# Altium PCB MiniCoil - Cap Board.PcbDoc
Units mm, origin at the board's own origin, x right, y up, seen from the top; angles counter-clockwise.
Board outline 233.11 x 109.35 mm, 2 copper layers (Top Layer, Bottom Layer); 30 components, 7 nets, 64 pads, 0 vias.
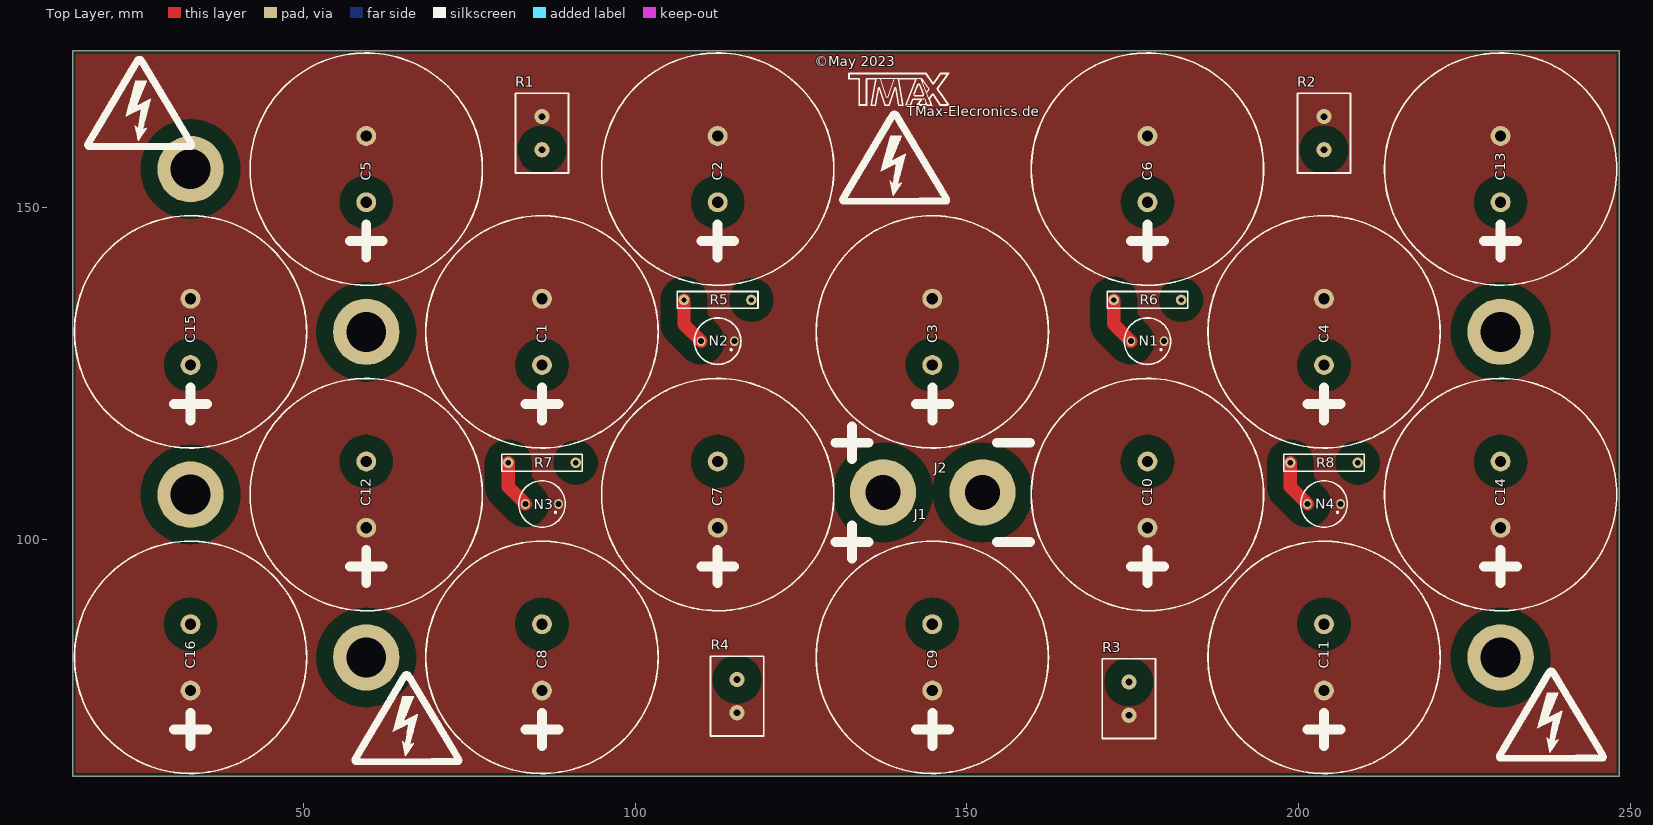
[diagram p0: Top Layer view]
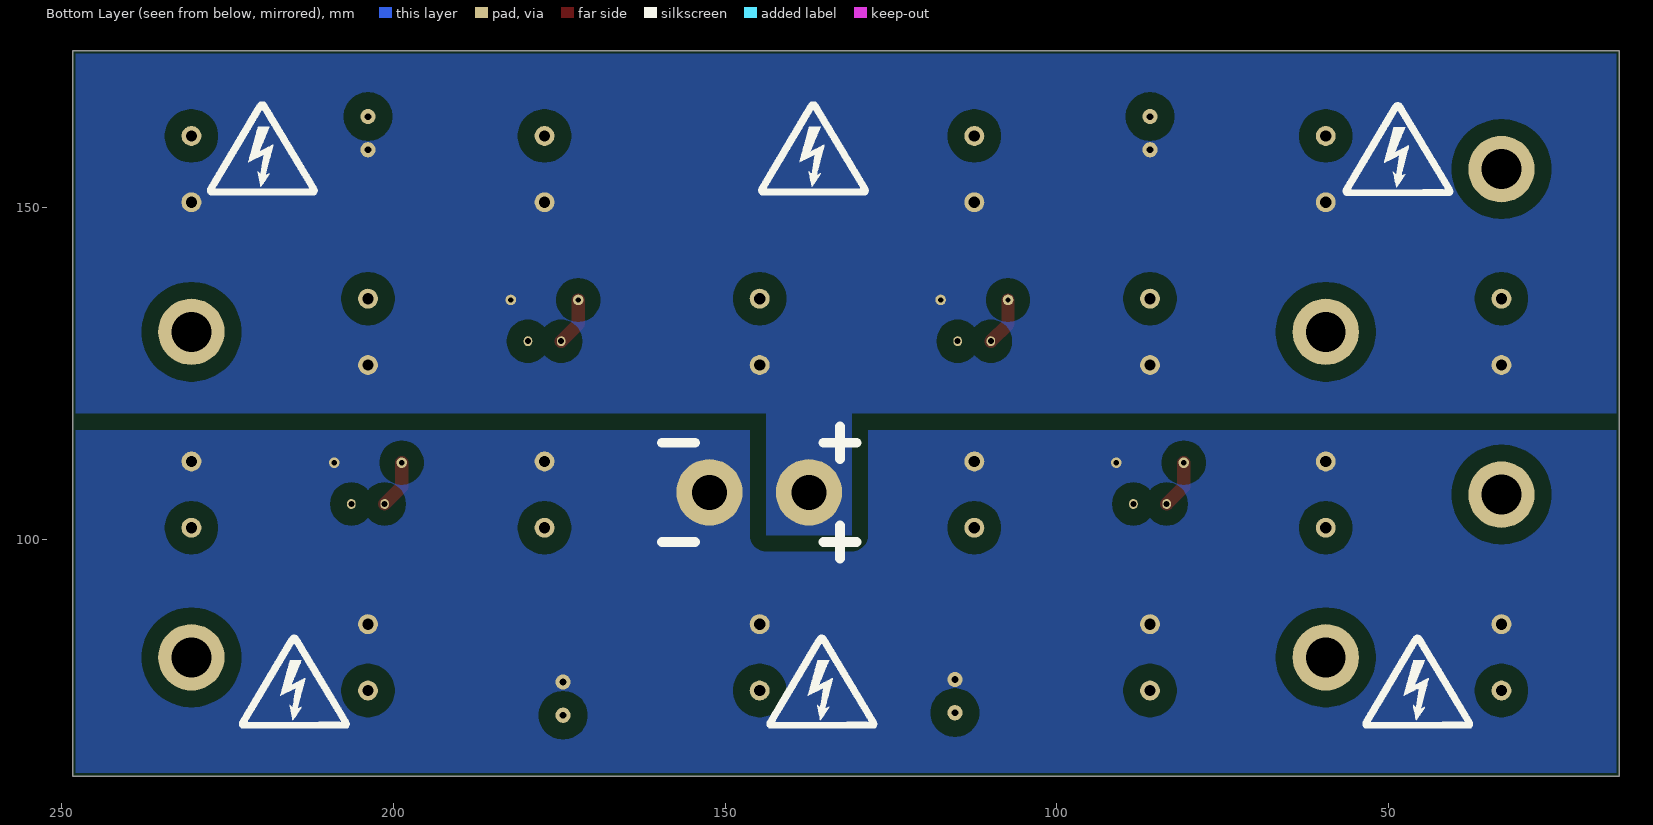
[diagram p1: Bottom Layer view, seen from below]
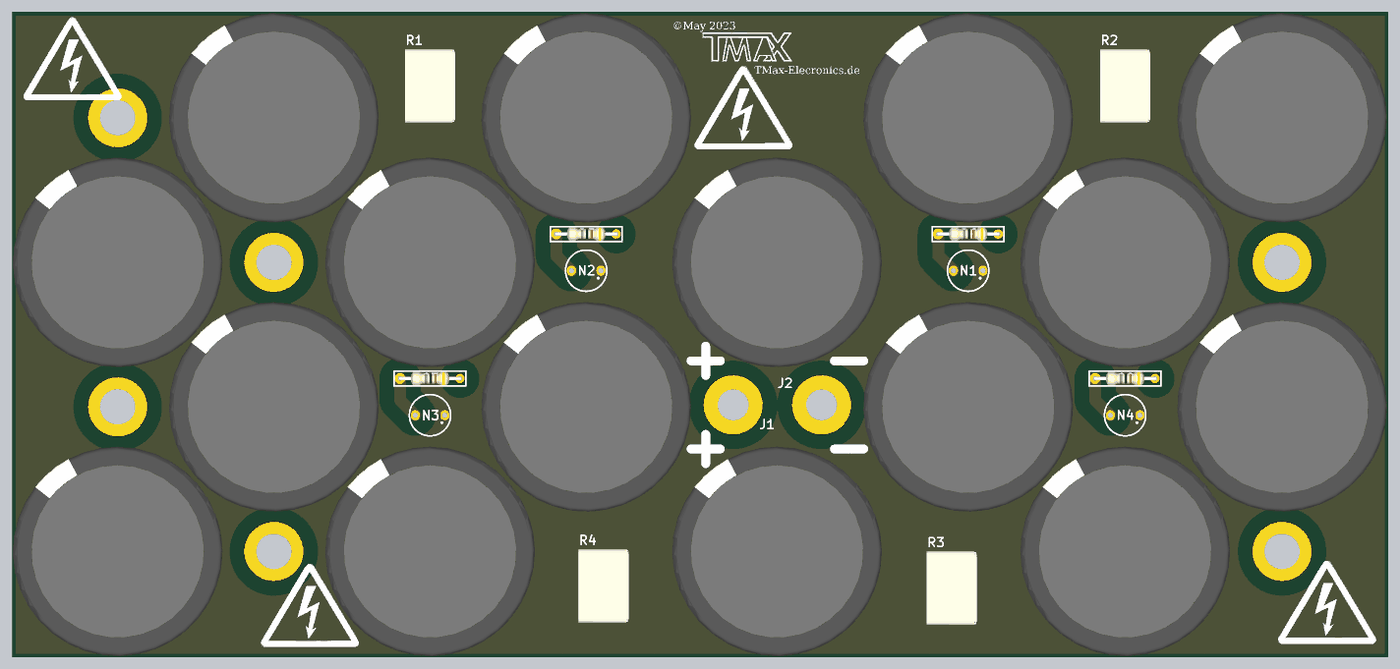
[diagram p2: 3D render of the assembled board from above, using the file's embedded part models]

## Layer stack, top to bottom
Top Solder: solder mask 0.0102, Solder Resist, Dk 3.5
Top Layer: signal copper 0.0356
Dielectric 1: dielectric 0.32, FR-4, Dk 4.8
Bottom Layer: signal copper 0.0356
Bottom Solder: solder mask 0.0102, Solder Resist, Dk 3.5

## Board outline
15.24,64.262 15.24,173.609 248.346,173.609 248.346,64.262

## Design rules (kind name [scope] priority, off if disabled: settings)
BoardOutlineClearance [All] p1: gap=0.5 ignorepadtopadclearanceinfootprint=FALSE except(0: Arc-SplitContinuation Track-SplitContinuation SMDPad-SplitContinuation THPad-SplitContinuation Via-SplitContinuation Fill-SplitContinuation Poly-SplitContinuation Region-SplitContinuation Text-SplitContinuation)
Clearance [All] p1: gap=2.5 ignorepadtopadclearanceinfootprint=FALSE except(0: Arc-Text Arc-Hole Track-Text Track-Hole SMDPad-Text SMDPad-Hole THPad-Text THPad-Hole Via-Text Via-Hole Fill-Text Fill-Hole Poly-Text Poly-Hole Region-Text Region-Hole Text-Text Text-Hole)
Height [All] p1: minheight=0 maxheight=1000 prefheight=0
PolygonConnect [All] p1: connectstyle=Direct reliefconductorwidth=0.254 reliefentries=4 polygonreliefangle="90 Angle" airgapwidth=0.254
RoutingVias [All] p1: holewidth=10 width=0.7 viastyle="Through Hole" minholewidth=0.3 minwidth=0.5 maxholewidth=0.4 maxwidth=10
SolderMaskExpansion [All] p1: expansion=0.102 istentingtop=FALSE
UnRoutedNet [All] p1: checkbadconnections=TRUE
Width [All] p1: maxlimit=10 minlimit=0.152 preferedwidth=0.4 minimp=50.000000 maximp=50.000000 favimp=50.000000
28 further rules are at their usual default settings.

## Components (designator, comment, footprint, x,y, rotation, side; value= is the part's Value field where it differs from the comment)
C1 "1mF 300V" "ELKO 35x50x10" 85.977,131.222 r90 top locked
C2 "1mF 300V" "ELKO 35x50x10" 112.458,155.749 r90 top locked
C3 "1mF 300V" "ELKO 35x50x10" 144.806,131.222 r90 top locked
C4 "1mF 300V" "ELKO 35x50x10" 203.831,131.222 r90 top locked
C5 "1mF 300V" "ELKO 35x50x10" 59.497,155.749 r90 top locked
C6 "1mF 300V" "ELKO 35x50x10" 177.222,155.749 r90 top locked
C7 "1mF 300V" "ELKO 35x50x10" 112.458,106.695 r90 top locked
C8 "1mF 300V" "ELKO 35x50x10" 85.977,82.169 r90 top locked
C9 "1mF 300V" "ELKO 35x50x10" 144.806,82.169 r90 top locked
C10 "1mF 300V" "ELKO 35x50x10" 177.222,106.695 r90 top locked
C11 "1mF 300V" "ELKO 35x50x10" 203.831,82.169 r90 top locked
C12 "1mF 300V" "ELKO 35x50x10" 59.497,106.695 r90 top locked
C13 "1mF 300V" "ELKO 35x50x10" 230.439,155.749 r90 top locked
C14 "1mF 300V" "ELKO 35x50x10" 230.439,106.695 r90 top locked
C15 "1mF 300V" "ELKO 35x50x10" 33.018,131.222 r90 top locked
C16 "1mF 300V" "ELKO 35x50x10" 33.018,82.169 r90 top locked
J1 "+" "575-8 Banana Jack" 137.373,107.032 r0 top
J2 "-" "575-8 Banana Jack" 152.373,107.032 r0 top
N1 "Nixie Dot" INS-1 177.221,129.81 r0 top
N2 "Nixie Dot" INS-1 112.457,129.81 r0 top
N3 "Nixie Dot" INS-1 85.977,105.283 r0 top
N4 "Nixie Dot" INS-1 203.83,105.283 r0 top
R1 "470k" "SQM-03 3W" 85.977,161.163 r90 top
R2 "470k" "SQM-03 3W" 203.828,161.163 r90 top
R3 "470k" "SQM-03 3W" 174.432,75.946 r90 top
R4 "470k" "SQM-03 3W" 115.377,76.327 r90 top
R5 "470k" "0207 THT" 112.457,136.033 r90 top
R6 "470k" "0207 THT" 177.221,136.033 r90 top
R7 "470k" "0207 THT" 85.977,111.506 r90 top
R8 "470k" "0207 THT" 203.83,111.506 r90 top

## Footprints (in the part's own frame and the unit in brackets; to place one, negate y for a bottom-side part, rotate by r counter-clockwise, add the part's x,y. Pads: shape width x height; smd on the part's side, far side on the other; paste and mask are expansions set on the pad)
"0207 THT" [mm]
  round 1.6 hole 0.8: 1(0,5.08) 2(0,-5.08)
  silkscreen extent -1.27,-6.08 1.27,6.08, body extent -1.15,-5.38 1.15,5.38, height 3.15
"575-8 Banana Jack" [mm] "Shitstone electronics 575-8 Banana Jack"
  round 10 hole 5.25: 1(0,0)
"ELKO 35x50x10" [mm]
  round 3 hole 1.7: 1(-5,0) 2(5,0)
  silkscreen extent -17.5,-17.5 17.5,17.5, body extent -17.78,-17.77 17.78,17.78, height 50.8
INS-1 [mm] "Neon dot"
  oval 1.3x1.5 hole 0.9: A(-2.5,0) K(2.5,0)
  silkscreen extent -3.5,-3.5 3.5,3.5, body extent -3.5,-3.5 3.5,3.5, height 28
"SQM-03 3W" [mm] "SQM-03 3W"
  round 2.3 hole 1: 1(2.5,0) 2(-2.5,0)
  silkscreen extent -6,-4 6,4, body extent -6.25,-4.25 6.25,4.25, height 25

## Part data
C1 C2 C3 C4 C5 C6 C7 C8 C9 C10 C11 C12 C13 C14 C15 C16: library part "Cap Polar", Supplier Part Number 1=478-9181-1-ND, Supplier 1=Digi-Key, Supplier 2=Digi-Key, Supplier 3=Digi-Key, Supplier 4=Digi-Key, Supplier 5=Digi-Key, Supplier 6=Digi-Key, Supplier 7=Digi-Key, Supplier 8=Digi-Key, Supplier Part Number 2=478-9173-1-ND, Supplier Part Number 3=493-11037-ND, Supplier Part Number 4=PCE3462CT-ND, Supplier Part Number 5=399-18864-1-ND, Supplier Part Number 6=399-10512-1-ND, Supplier Part Number 7=399-15746-ND, Supplier Part Number 8=1189-3752-1-ND
J1 J2: library part "Binding Post 1 Pin", Supplier Part Number 1=36-575-8-ND, Name=name, Supplier 1=Digi-Key
N1 N2 N3 N4: "Neon dot indicator"
R1 R2 R3 R4 R5 R6 R7 R8: library part Resistor

## Free pads (board coordinates)
  round 10 hole 6: 16(59.497,82.169) 16(59.497,131.222) ""(33.018,106.696) ""(33.018,155.749) ""(230.439,82.169) ""(230.439,131.222)

## Nets (pads, with @x,y where several pads share a name; then routed paths per layer and width w, separated by ;. In a path a pad name is that pad's centre, name@x,y a point inside that pad or via, vN(x,y) a via of type N, cw(c..) or ccw(c..) an arc to the next point about the centre after c; other vN are vias at no path point)
GND: C7.2 C8.2 C9.2 C10.2 C11.2 C12.2 C14.2 C16.2 J2.1 R3.1 R4.1 R7.2 R8.2
NetC1_1: C1.1 C2.1 C3.1 C4.1 C5.1 C6.1 C13.1 C15.1 J1.1 R1.2 R2.2 R5.2 R6.2
NetC1_2: C1.2 C2.2 C3.2 C4.2 C5.2 C6.2 C7.1 C8.1 C9.1 C10.1 C11.1 C12.1 C13.2 C14.1 C15.2 C16.1 N1.K N2.K N3.K N4.K R1.1 R2.1 R3.2 R4.2
NetN1_A: N1.A R6.1 | length 7.3
  Top Layer w2: R6.1 172.141,132.39 N1.A
NetN2_A: N2.A R5.1 | length 7.3
  Top Layer w2: R5.1 107.377,132.39 N2.A
NetN3_A: N3.A R7.1 | length 7.3
  Top Layer w2: R7.1 80.897,107.863 N3.A
NetN4_A: N4.A R8.1 | length 7.3
  Top Layer w2: R8.1 198.75,107.863 N4.A

## Polygon pours and split planes (outlines as drawn)
GND on Bottom Layer "NONET_L01_P-001" (solid, pour order 2): 15.24,118.935 248.346,118.935 248.346,64.262 15.24,64.262
NetC1_1 on Bottom Layer "NONET_L01_P-001" (solid, pour order 1): 143.808,100.597 143.808,122.015 130.938,122.015 130.938,100.597
NetC1_1 on Bottom Layer "NONET_L01_P-001" (solid, pour order 0): 15.24,118.935 248.346,118.935 248.346,173.609 15.24,173.609
NetC1_2 on Top Layer "NONET_L01_P-001" (solid, pour order 3): 15.24,64.262 248.346,64.262 248.346,173.609 15.24,173.609

## Silkscreen, mask and mechanical layers (free items; w line width, h text height)
Top Overlay:
  drawing of 86 lines, arcs and shapes, not listed
  text "©May 2023" at 127.07,170.749 h2.55
  text "TMax-Elecronics.de" at 140.97,163.195 h2.55
Bottom Overlay:
  drawing of 24 lines, arcs and shapes, not listed
Board Shape:
  the board outline again, w0.2